# Altium PCB PCB1.PcbDoc
Units mil, origin at the board's own origin, x right, y up, seen from the top; angles counter-clockwise.
Board outline 2060 x 1535 mil, 4 copper layers (Top Layer, Signal, Power, Ground), stack 23.756 mil thick; 67 components, 37 nets, 214 pads, 199 vias.
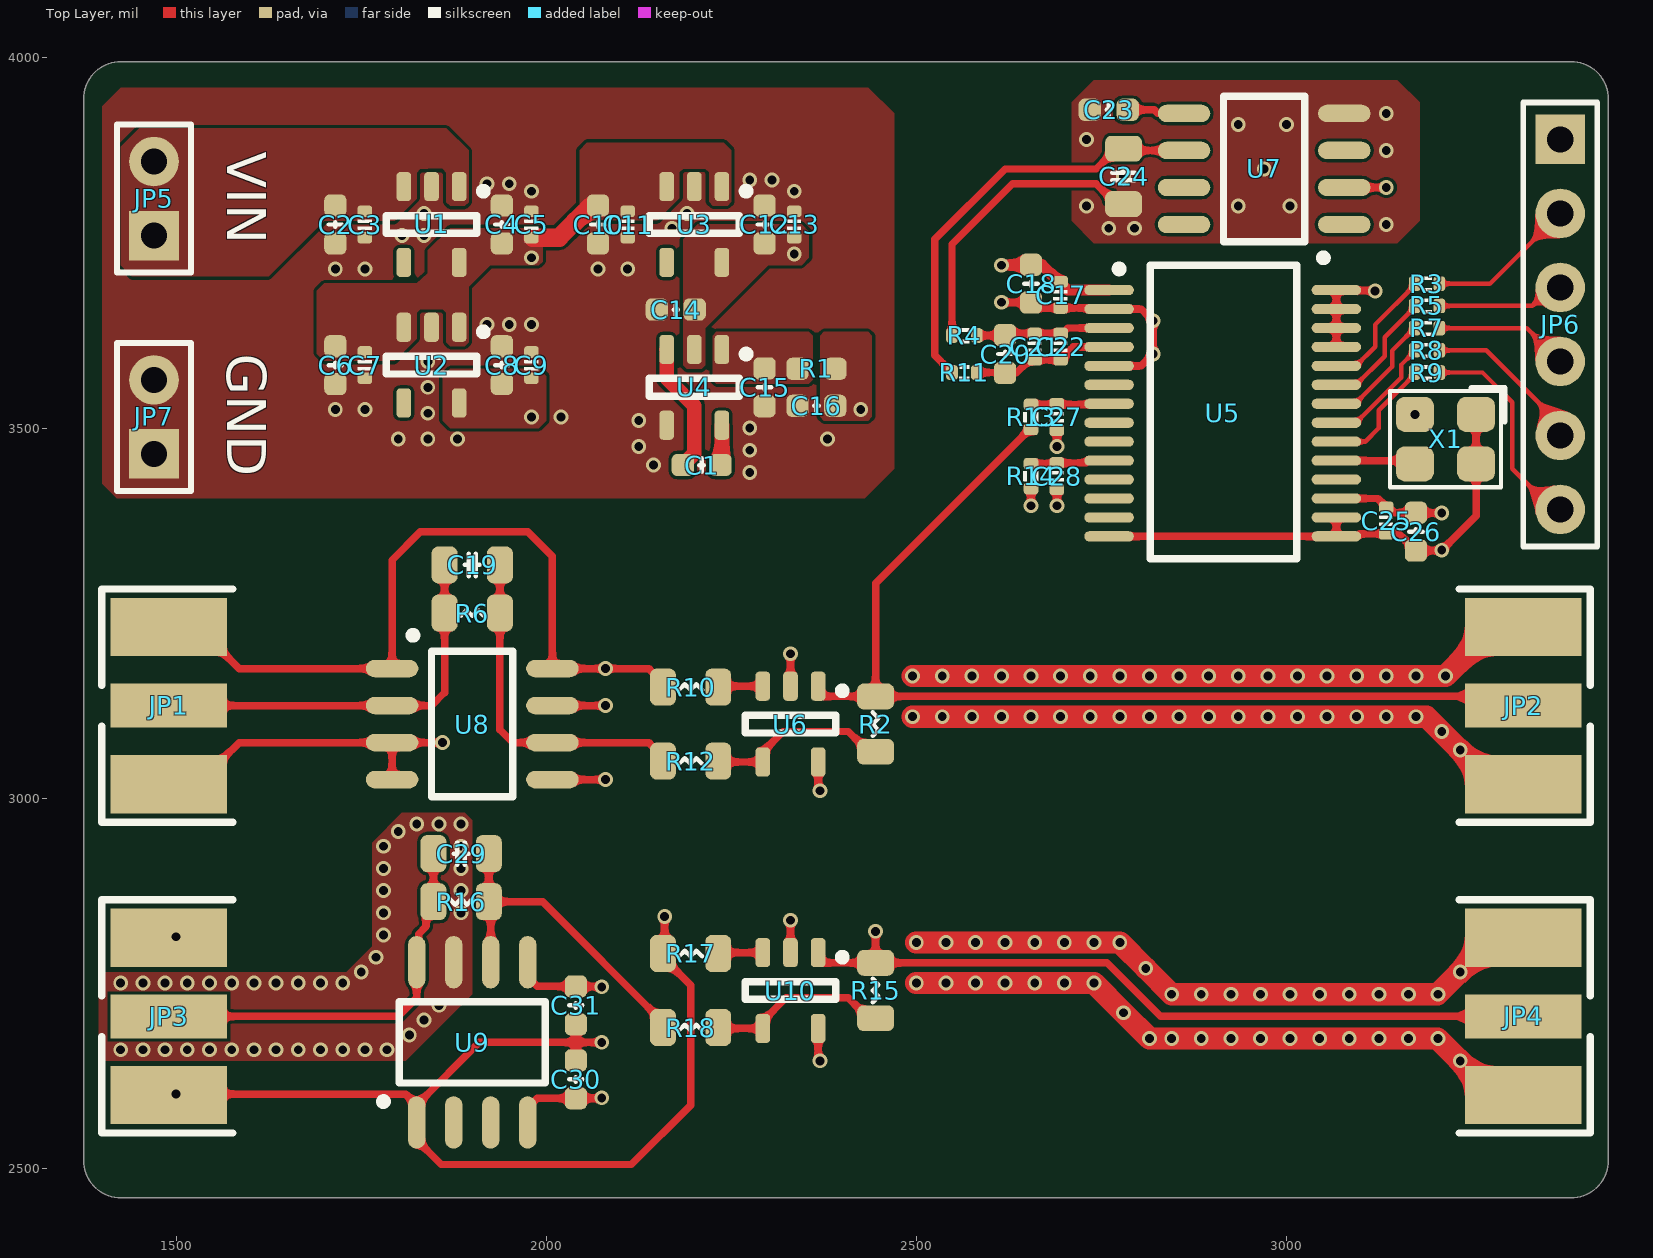
[diagram p0: Top Layer view]
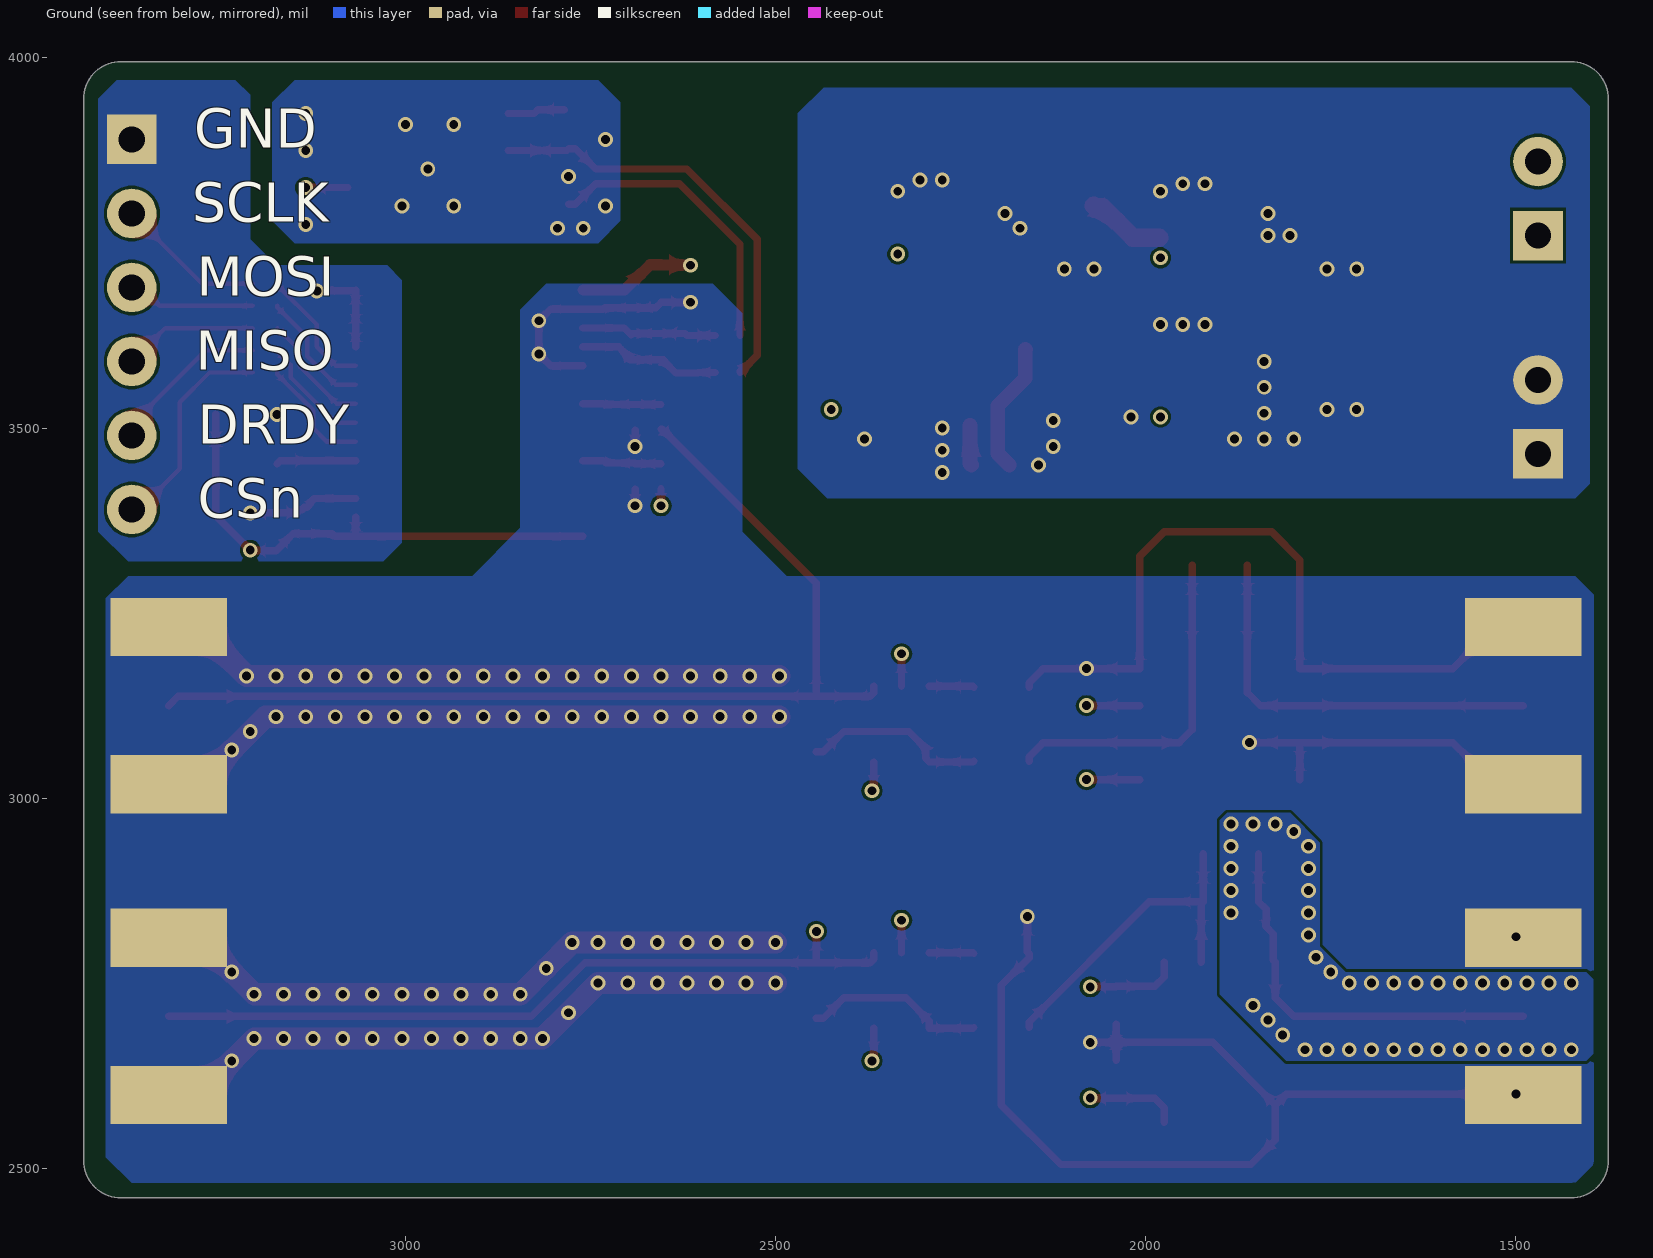
[diagram p1: Ground view, seen from below]
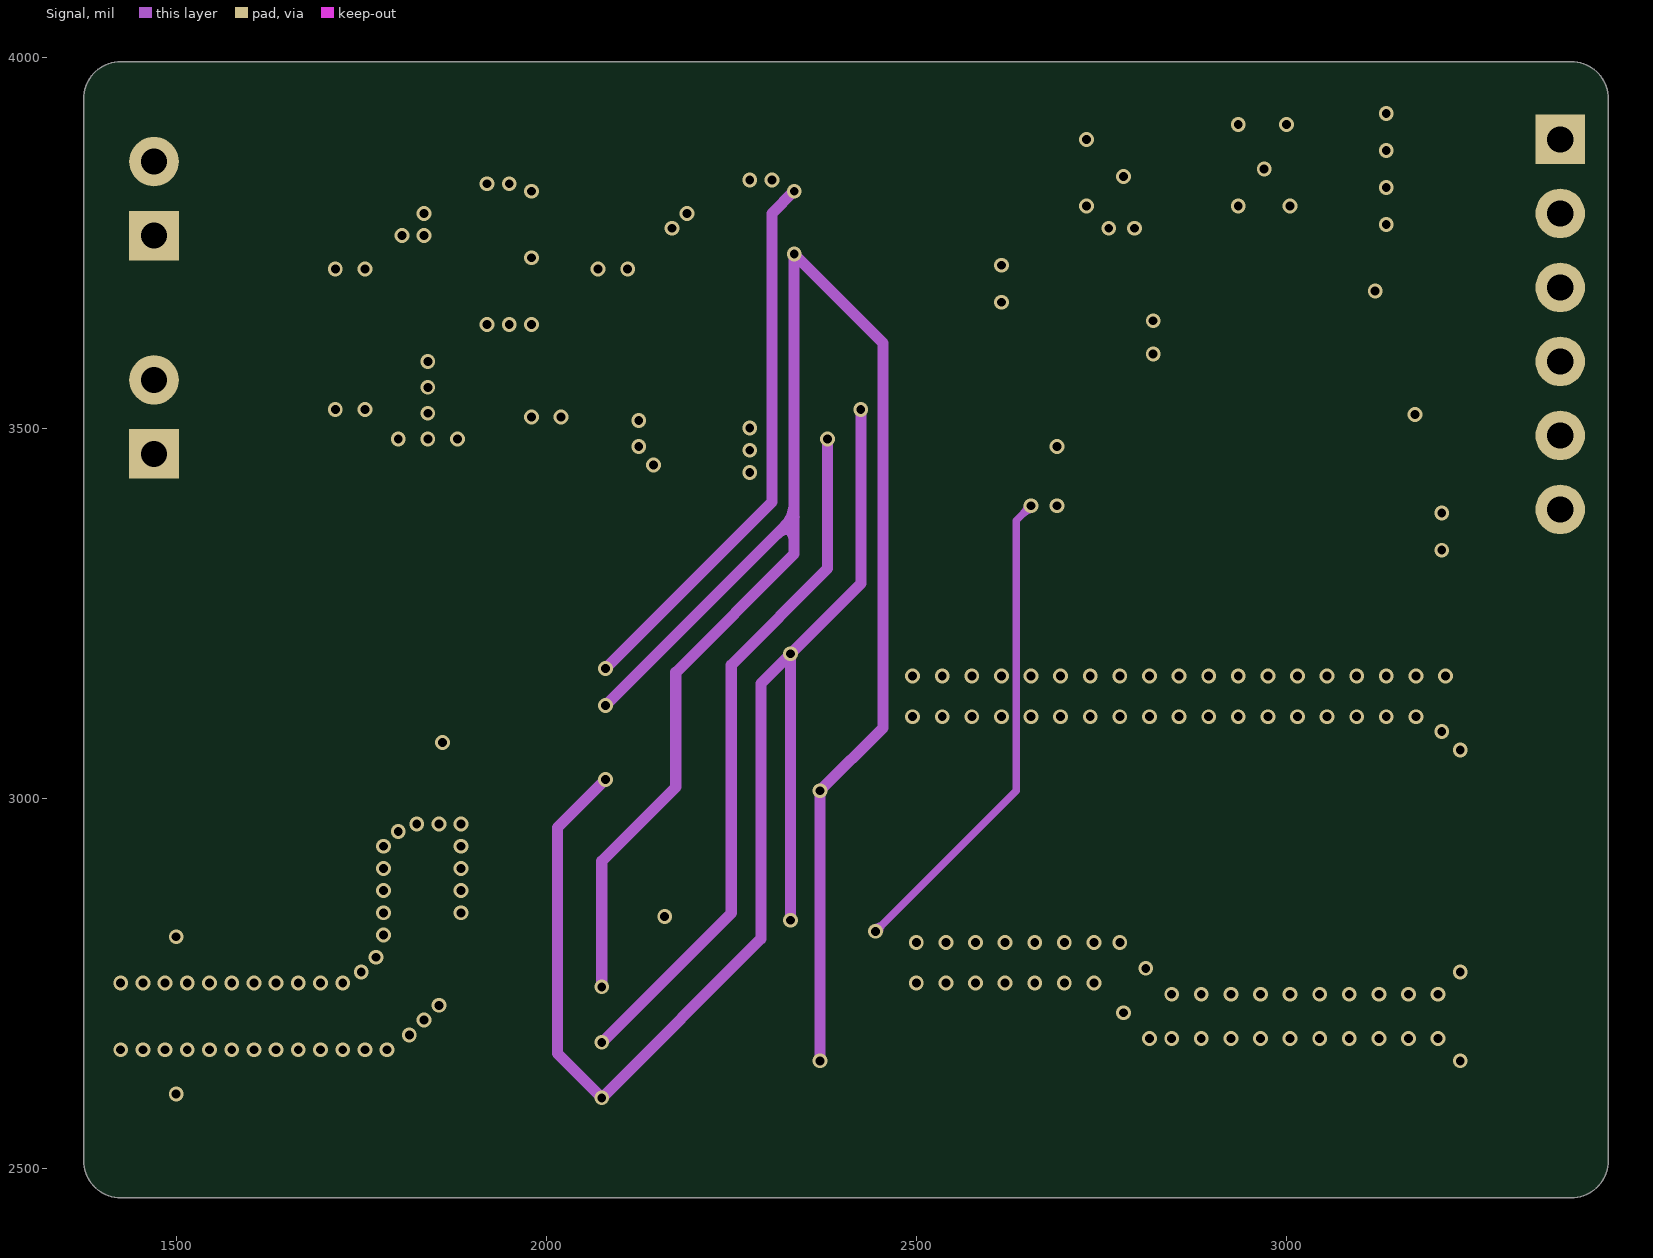
[diagram p2: Signal]
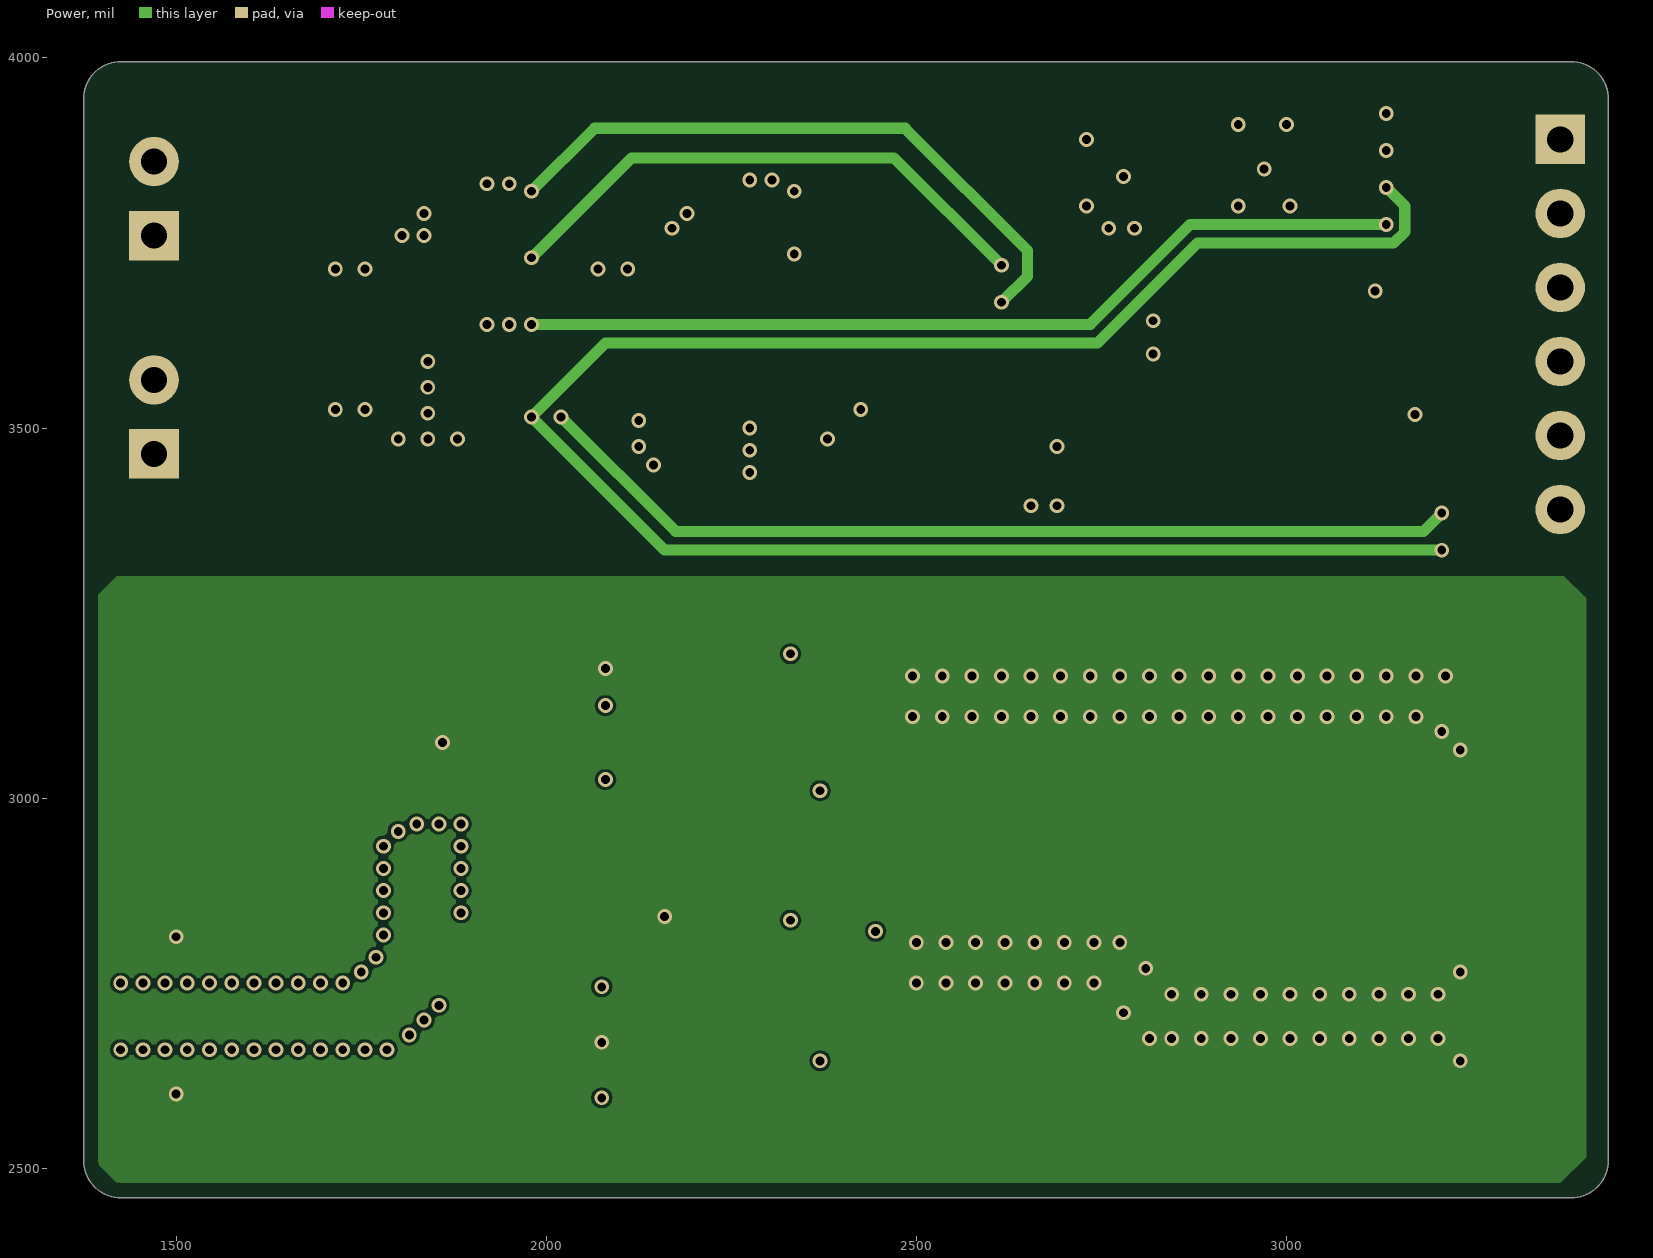
[diagram p3: Power]

## Layer stack, top to bottom
Top Solder: solder mask 0.4, Solder Resist, Dk 3.5
Top Layer: signal copper 1.4
Dielectric 2: prepreg 2.8, PP-006, Dk 4.1
Signal: signal copper 1.378
Dielectric 1: dielectric 12.6, FR-4, Dk 4.8
Power: signal copper 1.378
Dielectric 3: prepreg 2.8, PP-006, Dk 4.1
Ground: signal copper 1.4
Bottom Solder: solder mask 0.4, Solder Resist, Dk 3.5

## Board outline
1425,2460 cw(c1425,2510) 1375,2510 1375,3945 cw(c1425,3945) 1425,3995 3385,3995 cw(c3385,3945) 3435,3945 3435,2510 cw(c3385,2510) 3385,2460

## Design rules (kind name [scope] priority, off if disabled: settings)
AcuteAngle [All] p1: minimum=4.50000000000000E+0001 checktracksonly=FALSE
BoardOutlineClearance [All] p1: gap=20 ignorepadtopadclearanceinfootprint=FALSE
Clearance [All] p1: gap=4 ignorepadtopadclearanceinfootprint=TRUE
HoleSize [All] p1: absolutevalues=TRUE maxlimit=100 minlimit=5 maxpercent=80.000 minpercent=20.000
MinimumAnnularRing [All] p1: minimumring=3
MinimumSolderMaskSliver [All] p1: minsoldermaskwidth=3.2
PlaneClearance [All] p1: clearance=10
PolygonConnect PolygonConnect_Dir [All] p1: connectstyle=Direct reliefconductorwidth=10 reliefentries=4 polygonreliefangle="90 Angle" airgapwidth=10
PolygonConnect PolygonConnect_Relief [InNet('GRD')] p2: thpad.connectstyle=Relief thpad.reliefconductorwidth=10 thpad.reliefentries=4 thpad.polygonreliefangle="90 Angle" thpad.airgapwidth=6 smdpad.connectstyle=Relief smdpad.reliefconductorwidth=10 smdpad.reliefentries=4 smdpad.polygonreliefangle="90 Angle" smdpad.airgapwidth=6 via.connectstyle=Direct via.reliefconductorwidth=10 via.reliefentries=4 via.polygonreliefangle="90 Angle" via.airgapwidth=6
RoutingVias [All] p1: holewidth=12 width=24 viastyle="Through Hole" minholewidth=12 minwidth=16 maxholewidth=30 maxwidth=50
SMDEntry [All] p1: side=TRUE corner=TRUE anyangle=FALSE
SMDToCorner [All] p1: distance=0
SMDToPlane [All] p1: distance=0
SilkToSilkClearance [All] p1: silktosilkclearance=0
SilkToSolderMaskClearance [IsPad] p1: minsilkscreentomaskgap=0 clearancetoexposedcopper=TRUE
SolderMaskExpansion SolderMaskExpansion_Vias [IsVia] p1: expansion=2.5 istentingtop=TRUE
SolderMaskExpansion [All] p2: expansion=2 istentingtop=FALSE
SupplyNets "Schematic Supply Nets_5" [InNet('+2.5')] p1: voltage=0.000
SupplyNets "Schematic Supply Nets_4" [InNet('-2.5')] p2: voltage=0.000
SupplyNets "Schematic Supply Nets_3" [InNet('VIN')] p3: voltage=0.000
SupplyNets "Schematic Supply Nets_2" [InNet('+3.3')] p4: voltage=0.000
SupplyNets "Schematic Supply Nets_1" [InNet('GND')] p5: voltage=0.000
SupplyNets "Schematic Supply Nets" [InNet('+5')] p6: voltage=0.000
UnRoutedNet [All] p1: checkbadconnections=TRUE
Width [All] p1: maxlimit=300 minlimit=4 preferedwidth=10
24 further rules are at their usual default settings.

## Components (designator, comment, footprint, x,y, rotation, side; value= is the part's Value field where it differs from the comment)
C1 "1UF" C0603_NS 2210,3450 r180 top
C2 "1UF" C0603_NS 1715,3775 r90 top
C3 "0.1UF" C0402_NS 1755,3775 r90 top
C4 "1UF" C0603_NS 1940,3775 r270 top
C5 "0.1UF" C0402_NS 1980,3775 r270 top
C6 "1UF" C0603_NS 1715,3585 r90 top
C7 "0.1UF" C0402_NS 1755,3585 r90 top
C8 "1UF" C0603_NS 1940,3585 r270 top
C9 "0.1UF" C0402_NS 1980,3585 r270 top
C10 "1UF" C0603_NS 2070,3775 r90 top
C11 "0.1UF" C0402_NS 2110,3775 r90 top
C12 "1UF" C0603_NS 2295,3775 r270 top
C13 "0.1UF" C0402_NS 2335,3775 r270 top
C14 "1UF" C0603_NS 2175,3660 r0 top
C15 "1UF" C0603_NS 2295,3555 r90 top
C16 "0.1UF" C0603_NS 2365,3530 r0 top
C17 "0.1UF" C0402_NS 2695,3680 r90 top
C18 "4.7UF" C0603_NS 2655,3695 r270 top
C19 "10NF" C0805_NS 1900,3315 r0 top
C20 "4.7UF" C0603_NS 2620,3600 r270 top
C21 "0.1UF" C0402_NS 2660,3610 r270 top
C22 "0.1NF" C0402_NS 2695,3610 r270 top
C23 "1UF" C0603_NS 2760,3930 r0 top
C24 "10UF" C0805_NS 2780,3840 r270 top
C25 "0.1UF" C0402_NS 3135,3375 r270 top
C26 "4.7UF" C0603_NS 3175,3360 r90 top
C27 "470nF" C0402_NS 2690,3515 r90 top
C28 "470nF" C0402_NS 2690,3435 r90 top
C29 "10NF" C0805_NS 1885,2925 r180 top
C30 "0.1UF" C0603_NS 2040,2620 r90 top
C31 "0.1UF" C0603_NS 2040,2720 r90 top
JP1 "SMA" SMA-KE 1490,3125 r90 top locked
JP2 "SMA" SMA-KE 3320,3125 r270 top locked
JP3 "SMA" SMA-KE 1490,2705 r90 top locked
JP4 "SMA" SMA-KE 3320,2705 r270 top locked
JP5 "HDR-1X2" HDR2.54-LI-2P 1470,3810 r90 top
JP6 "HDR-1X6" HDR2.54-LI-6P 3370,3640 r270 top
JP7 "HDR-1X2" HDR2.54-LI-2P 1470,3515 r90 top
R1 "50R" R0603_NS 2365,3580 r0 top
R2 "1K@0.1%" R0805_NS 2445,3100 r90 top
R3 "100R" R0402_NS 3190,3695 r180 top
R4 "50R" R0402_NS 2565,3625 r180 top
R5 "100R" R0402_NS 3190,3665 r180 top
R6 "24K@0.1%" R0805_NS 1900,3250 r180 top
R7 "100R" R0402_NS 3190,3635 r180 top
R8 "100R" R0402_NS 3190,3605 r180 top
R9 "100R" R0402_NS 3190,3575 r180 top
R10 "500R@0.1%" R0805_NS 2195,3150 r180 top
R11 "50R" R0402_NS 2565,3575 r180 top
R12 "1K@0.1%" R0805_NS 2195,3050 r180 top
R13 "510R" R0402_NS 2655,3515 r270 top
R14 "510R" R0402_NS 2655,3435 r270 top
R15 "1K@0.1%" R0805_NS 2445,2740 r90 top
R16 "24K@0.1%" R0805_NS 1885,2860 r0 top
R17 "500R@0.1%" R0805_NS 2195,2790 r180 top
R18 "1K@0.1%" R0805_NS 2195,2690 r180 top
U1 "ME6231C50M5G" SOT23-5_L3.0_W1.7_P0.95 1845,3775 r270 top
U2 "RT9013-33GB" SOT23-5_L3.0_W1.7_P0.95 1845,3585 r270 top
U3 "RT9013-25GB" SOT23-5_L3.0_W1.7_P0.95 2200,3775 r270 top
U4 "TPS60403" SOT23-5_L3.0_W1.7_P0.95 2200,3555 r270 top
U5 "ADS1256" SSOP28_L10.2_W7.8_P0.65 2914.01,3520 r0 top
U6 "OPA333" SOT23-5_L3.0_W1.7_P0.95 2330,3100 r270 top
U7 "REF5025" SOP8_L6.0_W5.0_P1.27 2970,3850 r180 top
U8 "OPA129" SOP8_L6.0_W5.0_P1.27 1900,3100 r0 top
U9 "ADA4530-1" SOP8_L6.0_W5.0_P1.27 1900,2670 r90 top
U10 "OPA333" SOT23-5_L3.0_W1.7_P0.95 2330,2740 r270 top
X1 "80M" OSC-3225-4P 3215,3485 r180 top

## Footprints (in the part's own frame and the unit in brackets; to place one, negate y for a bottom-side part, rotate by r counter-clockwise, add the part's x,y. Pads: shape width x height; smd on the part's side, far side on the other; paste and mask are expansions set on the pad)
C0402_NS [mm] "贴片MLCC电容-无丝印"
  rrect50% 0.4x0.5 smd: 1(-0.45,0) 2(0.45,0)
  silkscreen extent -0.17,-0.23 0.17,0.23, body extent -0.5,-0.26 0.5,0.26, height 0.54
C0603_NS [mil] "贴片MLCC电容-无丝印"
  rrect50% 30x30 smd: 1(-25.59,0) 2(25.59,0)
  silkscreen extent -3,-9 3,9, body extent -31,-16 32,16, height 33
C0805_NS [mil] "贴片MLCC电容-无丝印"
  rrect50% 35x50 smd: 1(-37.4,0) 2(37.4,0)
  silkscreen extent -10,-15 10,15, body extent -39,-24 39,24, height 22
HDR2.54-LI-2P [mm] "排针，2脚"
  rect 1.7x1.7 hole 0.9: 1(-1.27,0)
  round 1.7 hole 0.9: 2(1.27,0)
  silkscreen extent -2.54,-1.27 2.54,1.27, body extent -2.54,-1.27 2.54,1.27, height 2.54
HDR2.54-LI-6P [mm] "排针，6脚"
  rect 1.7x1.7 hole 0.9: 1(-6.35,0)
  round 1.7 hole 0.9: 2(-3.81,0) 3(-1.27,0) 4(1.27,0) 5(3.81,0) 6(6.35,0)
  silkscreen extent -7.62,-1.27 7.62,1.27, body extent -7.62,-1.27 7.62,1.27, height 2.54
OSC-3225-4P [mm] "3.2*2.5*0.7mm(长宽高)"
  rrect50% 1.3x1.2 smd: 1(-1.05,-0.85) 2(1.05,-0.85) 3(1.05,0.85) 4(-1.05,0.85)
  silkscreen extent -2.03,-1.75 1.91,1.65, body extent -1.6,-1.25 1.6,1.25, height 0.7
R0402_NS [mm] "1/16W贴片电阻-无丝印"
  rrect50% 0.4x0.5 smd: 1(-0.425,0) 2(0.425,0)
  silkscreen extent -0.17,-0.24 0.17,0.24, body extent -0.5,-0.25 0.5,0.25, height 0.3
R0603_NS [mil] "1/10W贴片电阻-无丝印"
  rrect50% 30x30 smd: 1(-25.59,0) 2(25.59,0)
  body extent -31,-16 32,16, height 16
R0805_NS [mil] "1/8W贴片电阻-无丝印"
  rrect50% 35x50 smd: 1(-37.4,0) 2(37.4,0)
  silkscreen extent -16,-4 16,4, body extent -39,-25 39,25, height 20
SMA-KE [mm] "SMA 偏脚射频天线座"
  rect 1.5x4 smd: 1(0,0)
  rect 2x4 smd: 2(-2.7,0) 2(2.7,0)
  rect 2x4 smd far side: 3(-2.7,0) 3(2.7,0)
  silkscreen extent -4,-2.2 4,2.3, body extent -3.25,-1.33 3.25,12.17, height 3.75
SOP8_L6.0_W5.0_P1.27 [mm] "8脚，长x宽x高：6.0x5.0x1.8mm，脚距：1.27mm"
  oval 1.8x0.6 smd: 1(-2.75,1.905) 2(-2.75,0.635) 3(-2.75,-0.635) 4(-2.75,-1.905) 5(2.75,-1.905) 6(2.75,-0.635) 7(2.75,0.635) 8(2.75,1.905)
  silkscreen extent -2.16,-2.5 1.4,3.17, body extent -3,-2.5 3,2.5, height 1.9
SOT23-5_L3.0_W1.7_P0.95 [mm] "5脚，长x宽x高：3.0x1.7x1.45mm，脚距：0.95mm"
  rrect50% 1x0.5 smd: 1(-1.3,0.95) 2(-1.3,0) 3(-1.3,-0.95) 4(1.3,-0.95) 5(1.3,0.95)
  silkscreen extent -1.27,-1.55 0.3,1.9, body extent -1.4,-1.5 1.4,1.5, height 1.15
SSOP28_L10.2_W7.8_P0.65 [mm] "28脚，长x宽x高：10.2x7.8x1.9mm，脚距：0.65mm"
  oval 1.7x0.35 smd: 1(-3.9,4.225) 2(-3.9,3.575) 3(-3.9,2.925) 4(-3.9,2.275) 5(-3.9,1.625) 6(-3.9,0.975) 7(-3.9,0.325) 8(-3.9,-0.325) 9(-3.9,-0.975) 10(-3.9,-1.625) 11(-3.9,-2.275) 12(-3.9,-2.925) 13(-3.9,-3.575) 14(-3.9,-4.225) 15(3.9,-4.225) 16(3.9,-3.575) 17(3.9,-2.925) 18(3.9,-2.275) 19(3.9,-1.625) 20(3.9,-0.975) 21(3.9,-0.325) 22(3.9,0.325) 23(3.9,0.975) 24(3.9,1.625) 25(3.9,2.275) 26(3.9,2.925) 27(3.9,3.575) 28(3.9,4.225)
  silkscreen extent -3.68,-5 2.54,5.08, body extent -3.85,-5.1 3.85,5.1, height 1.65

## Part data
C1 C2 C3 C4 C5 C6 C7 C8 C9 C10 C11 C12 C13 C14 C15 C16 C17 C18 C19 C20 C21 C22 C23 C24 C25 C26 C27 C28 C29 C30 C31: library part C, "贴片电容/MLCC电容", BOM名称=MLCC
JP1 JP2 JP3 JP4: "SMA-2.4G射频天线接口", BOM名称=SMA-2.4G射频天线接口
JP5 JP7: library part "Header 2", "2P接插件", BOM名称=2P接插件
JP6: library part "Header 6", "6P接插件", BOM名称=6P接插件
R1 R2 R3 R4 R5 R6 R7 R8 R9 R10 R11 R12 R13 R14 R15 R16 R17 R18: library part R, "贴片电阻", BOM名称=贴片电阻
U1 U3: library part RT9013-33GB, "500mA 低压差, 低噪声, 超快速线性稳压器"
U2: "500mA 低压差, 低噪声, 超快速线性稳压器"
U4: "具有固定 250kHz 操作的 60mA 电荷泵电压反向器"
U5: "适用于工厂自动化和过程控制且具有 PGA 的 24 位、30kSPS、8 通道 Δ-Σ ADC"
U6 U10: "1.8V、17µA、微功耗、精密、零漂移 CMOS 运算放大器"
U7: library part REF50XX, "2.5V、3µVpp/V 噪声、3ppm/°C 温漂、精密串联电压基准"
U8: "超低偏置电流差动运算放大器"
U9: "微微安输入偏置电流静电计放大器"
X1: library part XTAL-ACT-4P, "4脚有源晶振(振荡器)", BOM名称=有源晶振(振荡器)

## Via types
v1: diameter 20, hole 12, Top Layer to Ground, tented both sides, 199 vias

## Nets (pads, with @x,y where several pads share a name; then routed paths per layer and width w, separated by ;. In a path a pad name is that pad's centre, name@x,y a point inside that pad or via, vN(x,y) a via of type N, cw(c..) or ccw(c..) an arc to the next point about the centre after c; other vN are vias at no path point)
+2.5: C12.2 C13.2 C14.2 C31.2 U3.5 U4.2 U6.5 U8.7 U9.5 U10.5 | length 2915.2
  Top Layer w10: U9.5 1975,2758.33 1987.74,2745.59 C31.2 2040.3,2745.29 2074.71,2745.29 v1(2075,2745) ; U8.7 v1(2080,3125) ; U10.5 2367.4,2650.3 2370,2647.71 v1(2370,2645) ; U6.5 2367.38,3015.33 2370,3012.71 v1(2370,3010)
  Signal w15: v1(2075,2745) 2075,2915 2175,3015 2175,3170 2335,3330 2335,3380 ; v1(2080,3125) 2335,3380 ; v1(2370,2645) v1(2370,3010) 2455,3095 2455,3615 v1(2335,3735) 2335,3380
+3.3: C8.2 C9.2 C25.2 C26.1 U2.5 U5.14 U5.15 U5.16 U7.2 X1.1 X1.4 | length 3404.2
  Top Layer w10: U5.14 U5.15 ; U5.16 U5.15 ; U7.2 v1(3135,3825) ; X1.1 X1.4 3256.34,3381.34 v1(3210,3335) 3209.41,3334.41 C26.1 3155.92,3353.49 3152.18,3357.23 3135.06,3357.23 C25.2 3098.77,3357.29 3095.15,3353.66 U5.15
  Power w15: v1(3135,3825) 3160,3800 3160,3765 3145,3750 2880,3750 2745,3615 2080,3615 v1(1980,3515) 2160,3335 v1(3210,3335)
+5: C4.2 C5.2 C6.2 C7.2 C10.2 C11.2 C17.2 C18.1 U1.5 U2.1 U2.3 U3.1 U3.3 U5.1 | length 1016.9
  Top Layer w15: v1(2615,3720) 2615.3,3720.3 2654.7,3720.3 C18.1 2670,3720.59 2704.25,3686.34 U5.1
  Top Layer w25: C5.2@1981.97,3757.29 2017.29,3757.29 2058.09,3798.09 2067.5,3798.09 C10.2
  Power w15: v1(1980,3730) 2115,3865 2470,3865 v1(2615,3720)
-2.5: C16.2 C30.1 R1.2 U6.2 U8.5 U9.4 U10.2 | length 2200.2
  Top Layer w10: U9.4 1975,2581.67 1987.74,2594.41 C30.1 2074.41,2594.41 v1(2075,2595) ; U8.5 v1(2080,3025) ; U10.2 v1(2330,2835) ; U6.2 v1(2330,3195)
  Signal w15: v1(2080,3025) 2015,2960 2015,2655 v1(2075,2595) 2290,2810 2290,3155 v1@2329.04,3194.04 ; v1(2330,2835) v1(2330,3195) 2425,3290 v1(2425,3525)
CSn: JP6.6 R9.1 | length 292.6
  Top Layer w6: R9.1 3265,3575 3305,3535 3305,3445 3360,3390 JP6.6
DRDY: JP6.5 R8.1 | length 219.7
  Top Layer w6: R8.1 3270,3605 3370,3505 JP6.5
GND: C2.1 C3.1 C4.1 C5.1 C6.1 C7.1 C8.1 C9.1 C10.1 C11.1 C12.1 C13.1 C14.1 C15.1 C16.1 C17.1 C18.2 C23.1 C24.2 C25.1 C26.2 C27.1 C28.1 C30.2 C31.1 JP1.2 JP1.3 JP2.2 JP2.3 JP3.2 JP3.3 JP4.2 JP4.3 JP6.1 JP7.1 JP7.2 R4.2 R10.2 R17.2 U1.2 U2.2 U3.2 U4.4 U5.2 U5.5 U5.17 U5.25 U5.26 U5.27 U5.28 U7.4 U8.1 U8.3 U8.4 U8.8 U9.1 X1.2 | length 12432
  Top Layer w10: JP1.2@1490,3018.7 1524.37,3053.07 1563.74,3053.07 1563.74,3053.74 1585,3075 U8.3 ; JP1.2@1490,3231.3 1524.37,3196.93 1563.74,3196.93 1563.74,3196.26 1585,3175 U8.1 1791.73,3321.73 1830,3360 1975,3360 2008.27,3326.73 U8.8 v1(2080,3175) 2138.36,3175 2157.6,3155.76 R10.2 ; v1(1500,2600) 1810,2600 U9.1@1825,2585 ; U8.4 U8.3 ; v1(1860,3075) U8.3 ; C30.2 2040,2670 ; C31.1 2040,2670 ; v1(2075,2670) 2040,2670 ; v1(2160,2840) 2160,2792.4 R17.2 2157.6,2784.53 2195,2747.13 2195,2585 2115,2505 1858.11,2505 1825,2538.11 U9.1 U9.1@1825,2585 ; R4.2 2548.27,3748.27 2630,3830 2743.26,3830 2770.66,3802.6 C24.2 ; v1(2615,3670) 2615.29,3669.71 2654.7,3669.71 C18.2 2662.13,3662.28 C17.1 2731.33,3662.28 2732.87,3660.75 U5.2 2804.25,3660.75 v1(2820,3645) v1(2820,3600) 2803.98,3583.98 U5.5 ; v1(2690,3395) C28.1 ; v1(2690,3475) C27.1 ; U5.17 3123.42,3404.84 3130.16,3398.11 3130.16,3395.59 3132.76,3392.99 3137.01,3392.99 3137.01,3392.67 3139.84,3389.84 3142.32,3389.84 3146.58,3385.59 C26.2 3175.3,3385.29 3209.71,3385.29 v1(3210,3385) ; U5.25 U5.26 U5.27 U5.28 3068.22,3685.67 3119.33,3685.67 v1(3120,3685) ; U9.1@1825,2585 1825,2585.35 1909.64,2670 2040,2670
  Top Layer w30: v1(2495,3110) 3189.33,3110 3256.26,3043.07 3280.63,3018.7 JP2.2@3320,3018.7 ; v1(2495,3165) v1(2535,3165) v1(2575,3165) v1(2615,3165) v1(2655,3165) v1(2695,3165) v1(2735,3165) v1(2775,3165) v1(2815,3165) v1(2855,3165) v1(2895,3165) v1(2935,3165) v1(2975,3165) v1(3015,3165) v1(3055,3165) v1(3095,3165) v1(3135,3165) v1(3175,3165) v1@3214.33,3165 ; v1(2500,2750) v1(2540,2750) v1(2580,2750) v1(2620,2750) v1(2660,2750) v1(2700,2750) v1(2740,2750) v1(2780,2710) v1(2815,2675) v1(2845,2675) v1(2885,2675) v1(2925,2675) v1(2965,2675) v1(3005,2675) v1(3045,2675) v1(3085,2675) v1(3125,2675) v1(3165,2675) 3204.33,2675 3280.63,2598.7 JP4.2@3320,2598.7 ; v1(2500,2805) v1(2540,2805) v1(2580,2805) v1(2620,2805) v1(2660,2805) v1(2700,2805) v1(2740,2805) v1(2775,2805) v1(2810,2770) v1(2845,2735) v1(2885,2735) v1(2925,2735) v1(2965,2735) v1(3005,2735) v1(3045,2735) v1(3085,2735) v1(3125,2735) v1(3165,2735) 3204.33,2735 3280.63,2811.3 JP4.2@3320,2811.3 ; v1(3215,3165) 3256.26,3206.26 3256.26,3206.93 3280.63,3231.3 JP2.2@3320,3231.3
  Signal w15: v1(2075,2670) 2250,2845 2250,3180 2380,3310 v1(2380,3485) ; v1(2080,3175) 2305,3400 2305,3790 v1(2335,3820)
  Power w15: v1(1980,3640) 2735,3640 2870,3775 v1(3135,3775) ; v1(1980,3820) 2065,3905 2485,3905 2650,3740 2650,3705 v1@2615.96,3670.96 ; v1(2020,3515) 2175,3360 3185,3360 v1@3209.04,3384.04
  other v1: 3235,2645 3205,2675 3205,2735 3235,2765 1500,2812.6 3235,3065 3210,3090 2535,3110 2575,3110 2615,3110 2655,3110 2695,3110 2735,3110 2775,3110 2815,3110 2855,3110 2895,3110 2935,3110 2975,3110 3015,3110 3055,3110 3095,3110 3135,3110 3175,3110 2275,3440 2145,3450 2275,3470 2125,3475 1800,3485 1840,3485 1880,3485 2275,3500 2125,3510 3173.66,3518.46 1840,3520 1715,3525 1755,3525 1840,3555 1840,3590 1920,3640 1950,3640 1715,3715 1755,3715 2070,3715 2110,3715 1805,3760 1835,3760 2170,3770 2760,3770 2795,3770 1835,3790 2190,3790 2730,3800 2935,3800 3005,3800 1920,3830 1950,3830 2275,3835 2305,3835 2780,3840 2970,3850 3135,3875 2730,3890 2935,3910 3000,3910 3135,3925
GRD: U9.7
  other v1: 1425,2660 1455,2660 1485,2660 1515,2660 1545,2660 1575,2660 1605,2660 1635,2660 1665,2660 1695,2660 1725,2660 1755,2660 1785,2660 1815,2680 1835,2700 1855,2720 1425,2750 1455,2750 1485,2750 1515,2750 1545,2750 1575,2750 1605,2750 1635,2750 1665,2750 1695,2750 1725,2750 1750,2765 1770,2785 1780,2815 1780,2845 1885,2845 1780,2875 1885,2875 1780,2905 1885,2905 1780,2935 1885,2935 1800,2955 1825,2965 1855,2965 1885,2965
I_SENSOR_P1: C19.1 JP1.1 R6.2 U8.2 | length 552.3
  Top Layer w10: JP1.1 1500,3125 U8.2 1845,3125 1862.6,3142.6 R6.2 C19.1
I_SENSOR_P2: C29.2 JP3.1 R16.1 U9.8 | length 549.7
  Top Layer w10: JP3.1 1800,2705 1825,2730 U9.8 1827.61,2780.87 1827.61,2816.31 1837.41,2826.11 1837.41,2849.82 R16.1 C29.2
MISO: JP6.4 R7.1 | length 181.9
  Top Layer w6: R7.1 3325,3635 JP6.4
MOSI: JP6.3 R5.1 | length 173.6
  Top Layer w6: R5.1 3332.4,3665 3357.4,3690 JP6.3
NetC1_1: C1.1 U4.5 | length 54.6
  Top Layer w20: C1.1 2237.4,3451.81 U4.5
NetC1_2: C1.2 U4.3 | length 178.1
  Top Layer w20: U4.3 2162.76,3606.02 2162.76,3567.24 2200,3530 2200,3465.59 C1.2
NetC15_2: C15.2 R1.1 U4.1
NetC20_1: C20.1 C21.1 C22.1 R4.1 U5.3 | length 183.5
  Top Layer w10: R4.1 C20.1@2620,3625 ; C20.1 2622.12,3627.72 C21.1 C22.1 ; C22.1@2695,3625.75 2704.41,3635.16 U5.3
NetC20_2: C20.2 C21.2 C22.2 R11.1 U5.4 | length 194.7
  Top Layer w10: R11.1 2604.41,3575 2605,3574.41 C20.2 2635,3574.41 2652.87,3592.29 2696.97,3592.29 2699.84,3595.16 2699.84,3597.13 2712.28,3609.57 U5.4
NetC23_2: C23.2 U7.5 | length 78.2
  Top Layer w10: C23.2 2821.3,3930 2826.3,3925 U7.5
NetC27_2: C27.2 R13.1 U5.7 | length 105.9
  Top Layer w10: R13.1 2731.8,3531.73 2732.87,3532.8 U5.7
NetC28_2: C28.2 R14.1 U5.10 | length 106.8
  Top Layer w10: R14.1 C28.2@2690,3451.73 ; C28.2 2729.56,3452.71 2732.87,3456.02 U5.10
NetR2_1: R2.1 R12.1 U6.4 | length 249.6
  Top Layer w10: R12.1 2233.58,3048.82 U6.4 2297.44,3053.66 2297.44,3067.44 2320,3090 2408.26,3090 2435.66,3062.6 R2.1
NetR3_2: R3.2 U5.24 | length 170.4
  Top Layer w6: U5.24 3094.13,3583.98 3120,3609.85 3120,3639.76 3173.27,3693.03 R3.2
NetR5_2: R5.2 U5.23 | length 166
  Top Layer w6: U5.23 3094.13,3558.39 3132.77,3597.03 3132.77,3622.54 3173.27,3663.03 R5.2
NetR7_2: R7.2 U5.22 | length 161.6
  Top Layer w6: U5.22 3092.8,3532.8 3142.77,3582.77 3142.77,3604.5 3167,3628.74 3168.47,3628.74 3173.27,3633.54 R7.2
NetR8_2: R8.2 U5.21 | length 157.2
  Top Layer w6: U5.21 3094.13,3507.2 3155,3568.08 3155,3585.27 3173.27,3603.54 R8.2
NetR9_2: R9.2 U5.20 | length 160.1
  Top Layer w6: U5.20 3106.61,3481.61 3125,3500 3125,3523.94 3168.39,3567.33 3168.39,3567.65 3173.27,3572.52 R9.2
NetR10_1: R10.1 U6.3 | length 60.7
  Top Layer w10: R10.1 2233.58,3151.18 U6.3
NetR15_1: R15.1 R18.1 U10.4 | length 247.3
  Top Layer w10: R18.1 2233.58,2688.82 U10.4 2292.6,2698.66 2323.94,2730 2408.07,2730 2435.47,2702.6 R15.1
NetR17_1: R17.1 U10.3 | length 60.7
  Top Layer w10: R17.1 2233.58,2791.18 U10.3
NetU5_19: U5.19 X1.3 | length 108
  Top Layer w10: U5.19 3169.17,3456.02 X1.3
SCLK: JP6.2 R3.1 | length 202.6
  Top Layer w6: R3.1 3275,3695 JP6.2
VIN: C2.2 C3.2 JP5.1 JP5.2 U1.1 U1.3
Vmid1: C19.2 R6.1 R12.2 U8.6 | length 463.6
  Top Layer w10: C19.2 R6.1 1937.4,3092.6 1955,3075 2138.36,3075 2157.6,3055.76 R12.2
Vmid2: C29.1 R16.2 R18.2 U9.6 | length 457.8
  Top Layer w10: C29.1 R16.2 ; U9.6 1925,2857.4 R16.2 ; R18.2 2157.6,2697.5 1995.1,2860 R16.2
Vout1: JP2.1 R2.2 R13.2 U6.1 | length 1417.7
  Top Layer w10: U6.1 2367.4,3142.24 2372.24,3137.4 R2.2 ; R13.2 2653.03,3498.27 2445,3290.24 R2.2 ; JP2.1 3307.6,3137.4 2452.5,3137.4 R2.2
Vout2: JP4.1 R14.2 R15.2 U10.1 | length 1721.4
  Top Layer w10: U10.1 2367.4,2782.24 2372.24,2777.4 R15.2 ; v1(2445,2820) R15.2 ; v1(2655,3395) R14.2 ; JP4.1 2830,2705 2757.6,2777.4 R15.2
  Signal w10: v1(2445,2820) 2635,3010 2635,3375 v1(2655,3395)
VREF: C24.1 R11.2 U7.6 | length 579.2
  Top Layer w10: R11.2 2548.27,3576.97 2545.39,3579.84 2543.43,3579.84 2525,3598.27 2525,3755 2620,3850 2743.06,3850 2770.47,3877.4 C24.1 2782.4,3875 U7.6
pads on no net: U1.4 U2.4 U3.4 U5.6 U5.8 U5.9 U5.11 U5.12 U5.13 U5.18 U7.1 U7.3 U7.7 U7.8 U9.2 U9.3

## Polygon pours and split planes (outlines as drawn)
GND on Top Layer "NONET_L-01_P-001" (solid, pour order 21): 2740,3970 3150,3970 3180,3940 3180,3780 3150,3750 2740,3750 2710,3780 2710,3940
GND on Top Layer "NONET_L-01_P-001" (solid, pour order 19): 1425,3960 1400,3935 1400,3425 1420,3405 1730,3405 2080,3405 2430,3405 2470,3445 2470,3925 2435,3960
+3.3 on Top Layer "NONET_L-01_P-001" (solid, pour order 17): 1870,3580 1860,3570 1860,3510 1870,3500 1990,3500 2000,3510 2000,3570 1990,3580
-2.5 on Top Layer "NONET_L-01_P-001" (solid, pour order 16): 2370,3625 2370,3515 2375,3510 2435,3510 2440,3515 2440,3625 2435,3630 2375,3630
+2.5 on Top Layer "NONET_L-01_P-001" (solid, pour order 15): 2205,3775 2185,3755 2185,3585 2190,3580 2210,3580 2215,3585 2215,3635 2300,3720 2345,3720 2355,3730 2355,3765 2345,3775
+5 on Top Layer "NONET_L-01_P-001" (solid, pour order 14): 2220,3805.59 2225,3800.59 2245,3800.59 2250,3805.59 2250,3875.59 2240,3885.59 2055,3885.59 2045,3875.59 2045,3790.59 2055,3780.59 2150,3780.59 2180,3810.59 2180,3845.59 2185,3850.59 2215,3850.59 2220,3845.59
+5 on Top Layer "NONET_L-01_P-001" (solid, pour order 13): 1870,3770 1840,3740 1840,3709.41 1825.31,3695.59 1700,3695.59 1690,3685.59 1690,3600.59 1700,3590.59 1795,3590.59 1825,3620.59 1825,3655.59 1830,3660.59 1860,3660.59 1865,3655.59 1865,3615.59 1870,3610.59 1890,3610.59 1895,3615.59 1895,3690.61 1924.38,3720 1990,3720 1995,3725 1995,3765 1990,3770
VIN on Top Layer "NONET_L-01_P-001" (solid, pour order 12): 1680,3905 1450,3905 1425,3880 1425,3720 1440,3705 1625,3705 1700,3780 1795,3780 1825,3810 1825,3845 1830,3850 1860,3850 1865,3845 1865,3805 1870,3800 1890,3800 1895,3805 1895,3875 1865,3905
NetC15_2 on Top Layer "NONET_L-01_P-001" (solid, pour order 7): 2230,3630 2225,3625 2225,3565 2230,3560 2355,3560 2360,3565 2360,3625 2355,3630
GRD on Top Layer "NONET_L-01_P-001" (solid, pour order 9): 1730,2765 1765,2800 1765,2940 1805,2980 1890,2980 1900,2970 1900,2735 1810,2645 1405,2645 1390,2660 1390,2750 1405,2765
GND on Ground "NONET_L-01_P-001" (solid, pour order 28): 1425,3960 1400,3935 1400,3425 1420,3405 1730,3405 2080,3405 2430,3405 2470,3445 2470,3925 2435,3960
GND on Ground "Ground-GND" (solid, pour order 25): 3375,3300 3405,3270 3405,2515 3370,2480 1420,2480 1395,2505 1395,3275 1420,3300 2485,3300 2545,3360 2545,3655 2585,3695 2810,3695 2845,3660 2845,3365 2910,3300
GND on Ground "NONET_L-01_P-001" (solid, pour order 22): 2740,3970 3150,3970 3180,3940 3180,3780 3150,3750 2740,3750 2710,3780 2710,3940
GND on Ground "NONET_L-01_P-001" (solid, pour order 26): 3390,3970 3415,3945 3415,3360 3375,3320 3030,3320 3005,3345 3005,3700 3025,3720 3175,3720 3210,3755 3210,3950 3230,3970 3210,3950 3230,3970
GRD on Ground "NONET_L-01_P-001" (solid, pour order 11): 1730,2765 1765,2800 1765,2940 1805,2980 1890,2980 1900,2970 1900,2735 1810,2645 1405,2645 1390,2660 1390,2750 1405,2765
GND on Power "Power-GND" (solid, pour order 27): 3375,3300 3405,3270 3405,2515 3370,2480 1420,2480 1395,2505 1395,3275 1420,3300

## Silkscreen, mask and mechanical layers (free items; w line width, h text height)
Top Overlay:
  text "VIN" at 1551.16,3873.62 h90 r270
  text "GND" at 1551.13,3600.22 h90 r270
Bottom Overlay:
  text "GND" at 3285.48,3861.17 h90
  text "SCLK" at 3287.99,3761.23 h90
  text "MOSI" at 3282.37,3661.23 h90
  text "MISO" at 3283.38,3561.23 h90
  text "DRDY" at 3281.14,3461.2 h90
  text "CSn" at 3280.87,3361.23 h90
Mechanical 1:
  the board outline again, w10